# Altium PCB LAST.PcbDoc
Units mm, origin at the board's own origin, x right, y up, seen from the top; angles counter-clockwise.
Board outline 102.6 x 102.6 mm, 4 copper layers (Top Layer, Internal Plane 1, Internal Plane 2, Bottom Layer); 24 components, 43 nets, 165 pads, 0 vias.
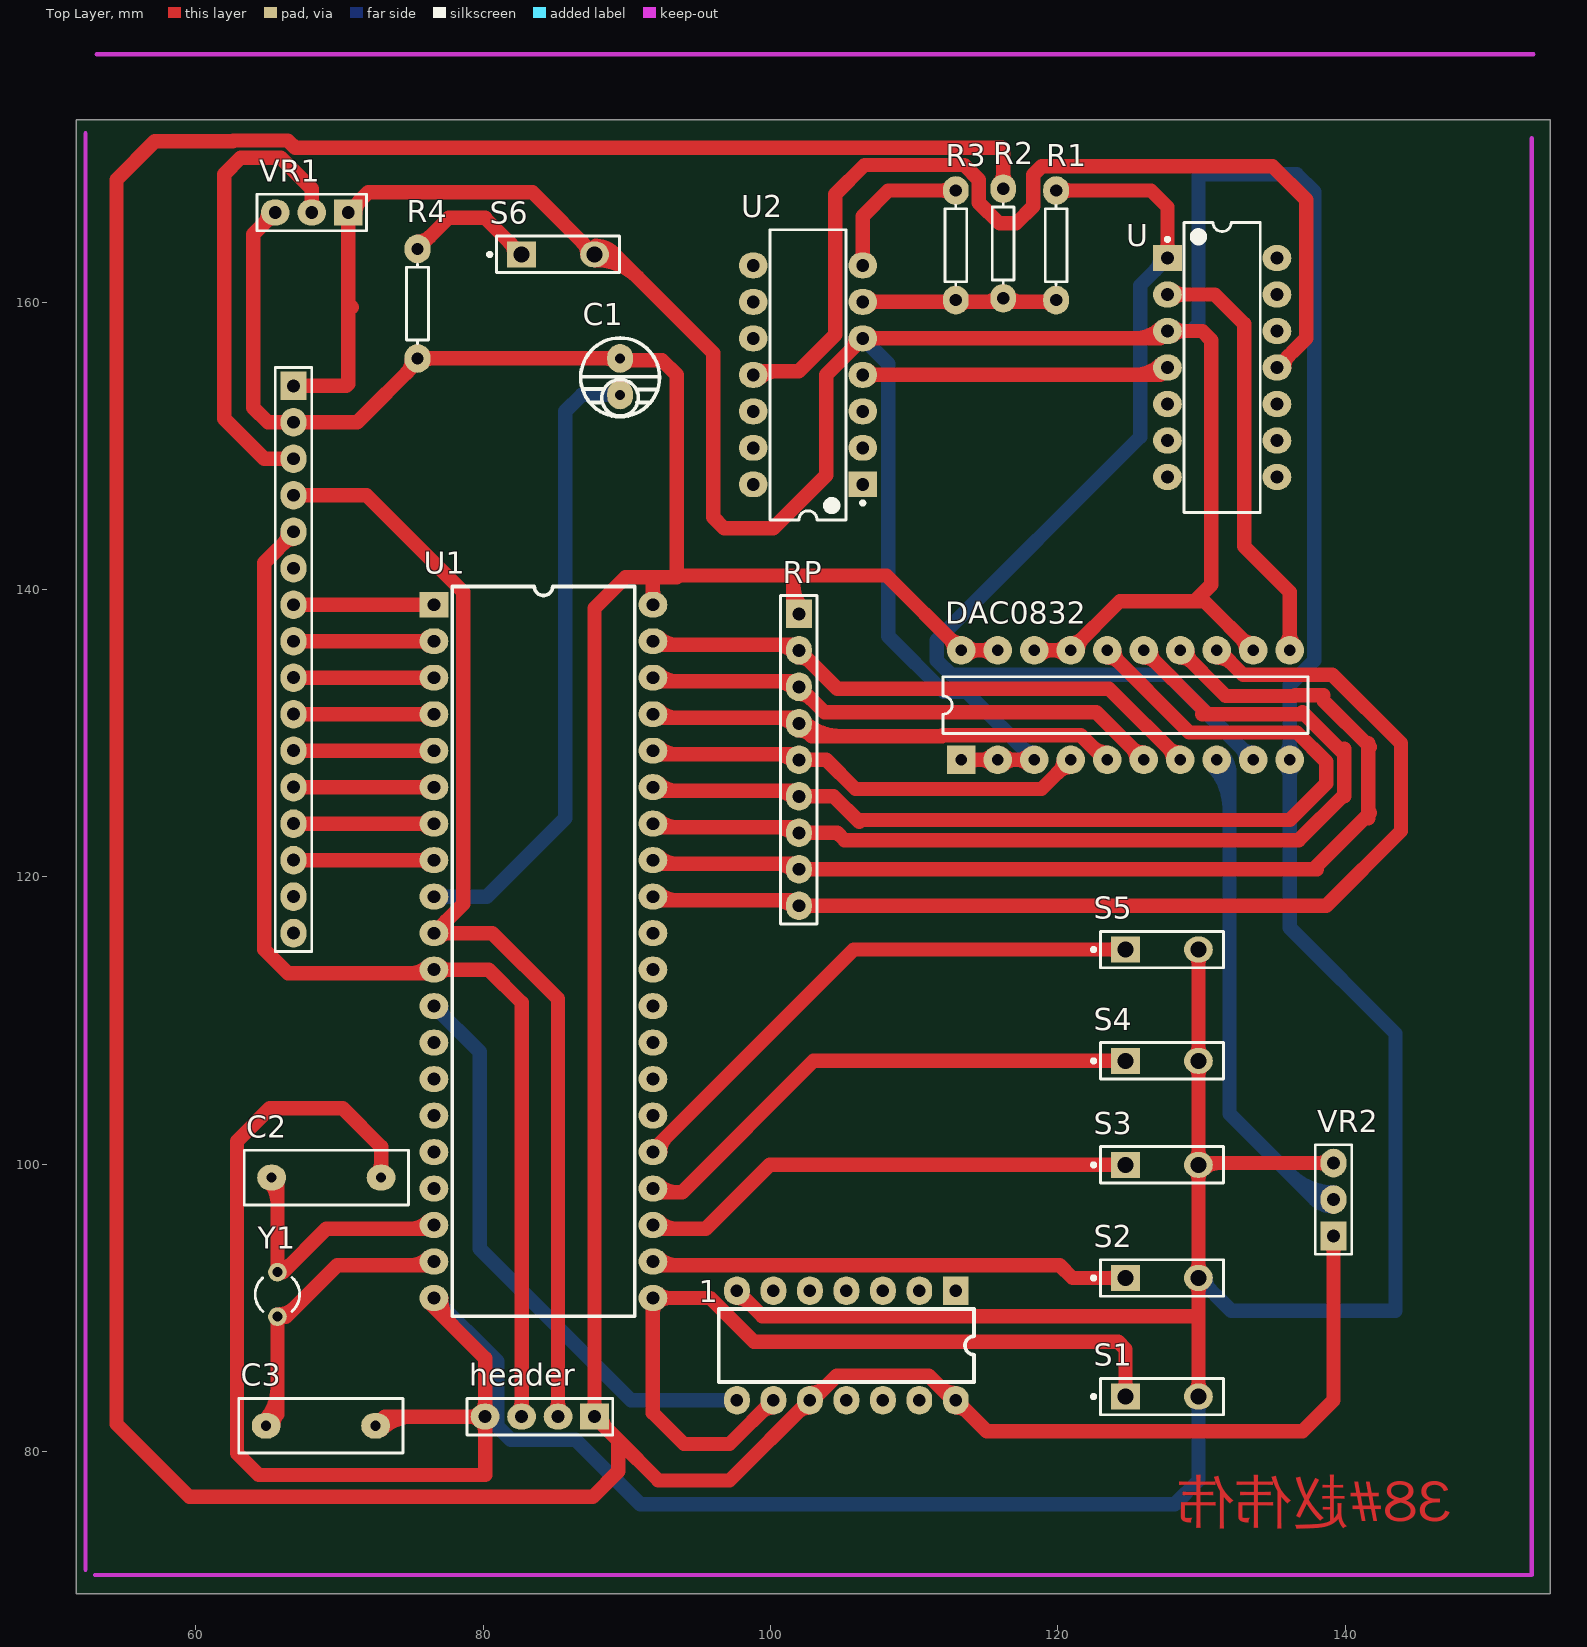
[diagram p0: Top Layer view]
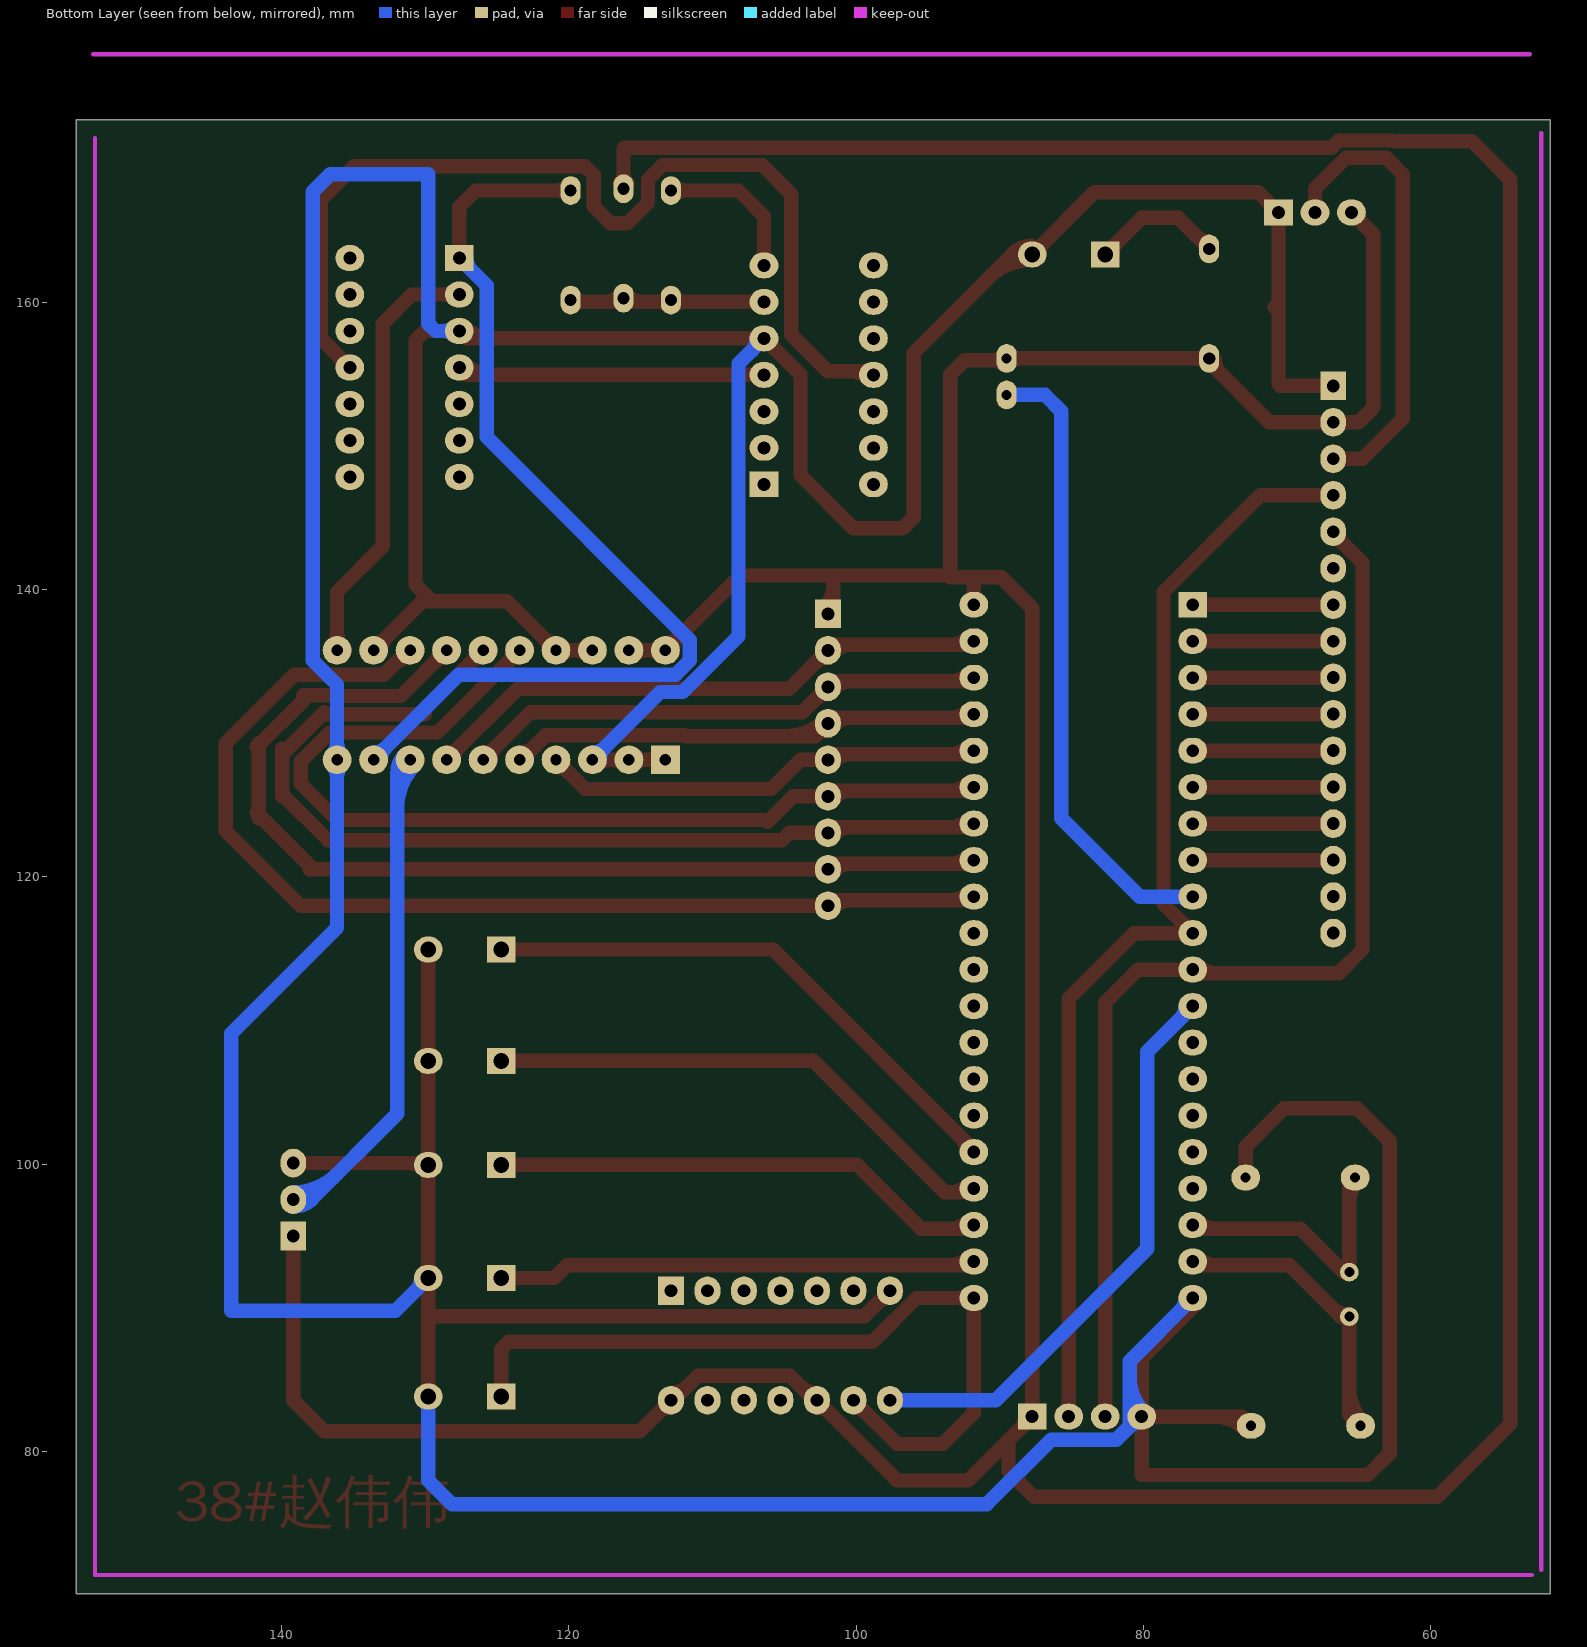
[diagram p1: Bottom Layer view, seen from below]
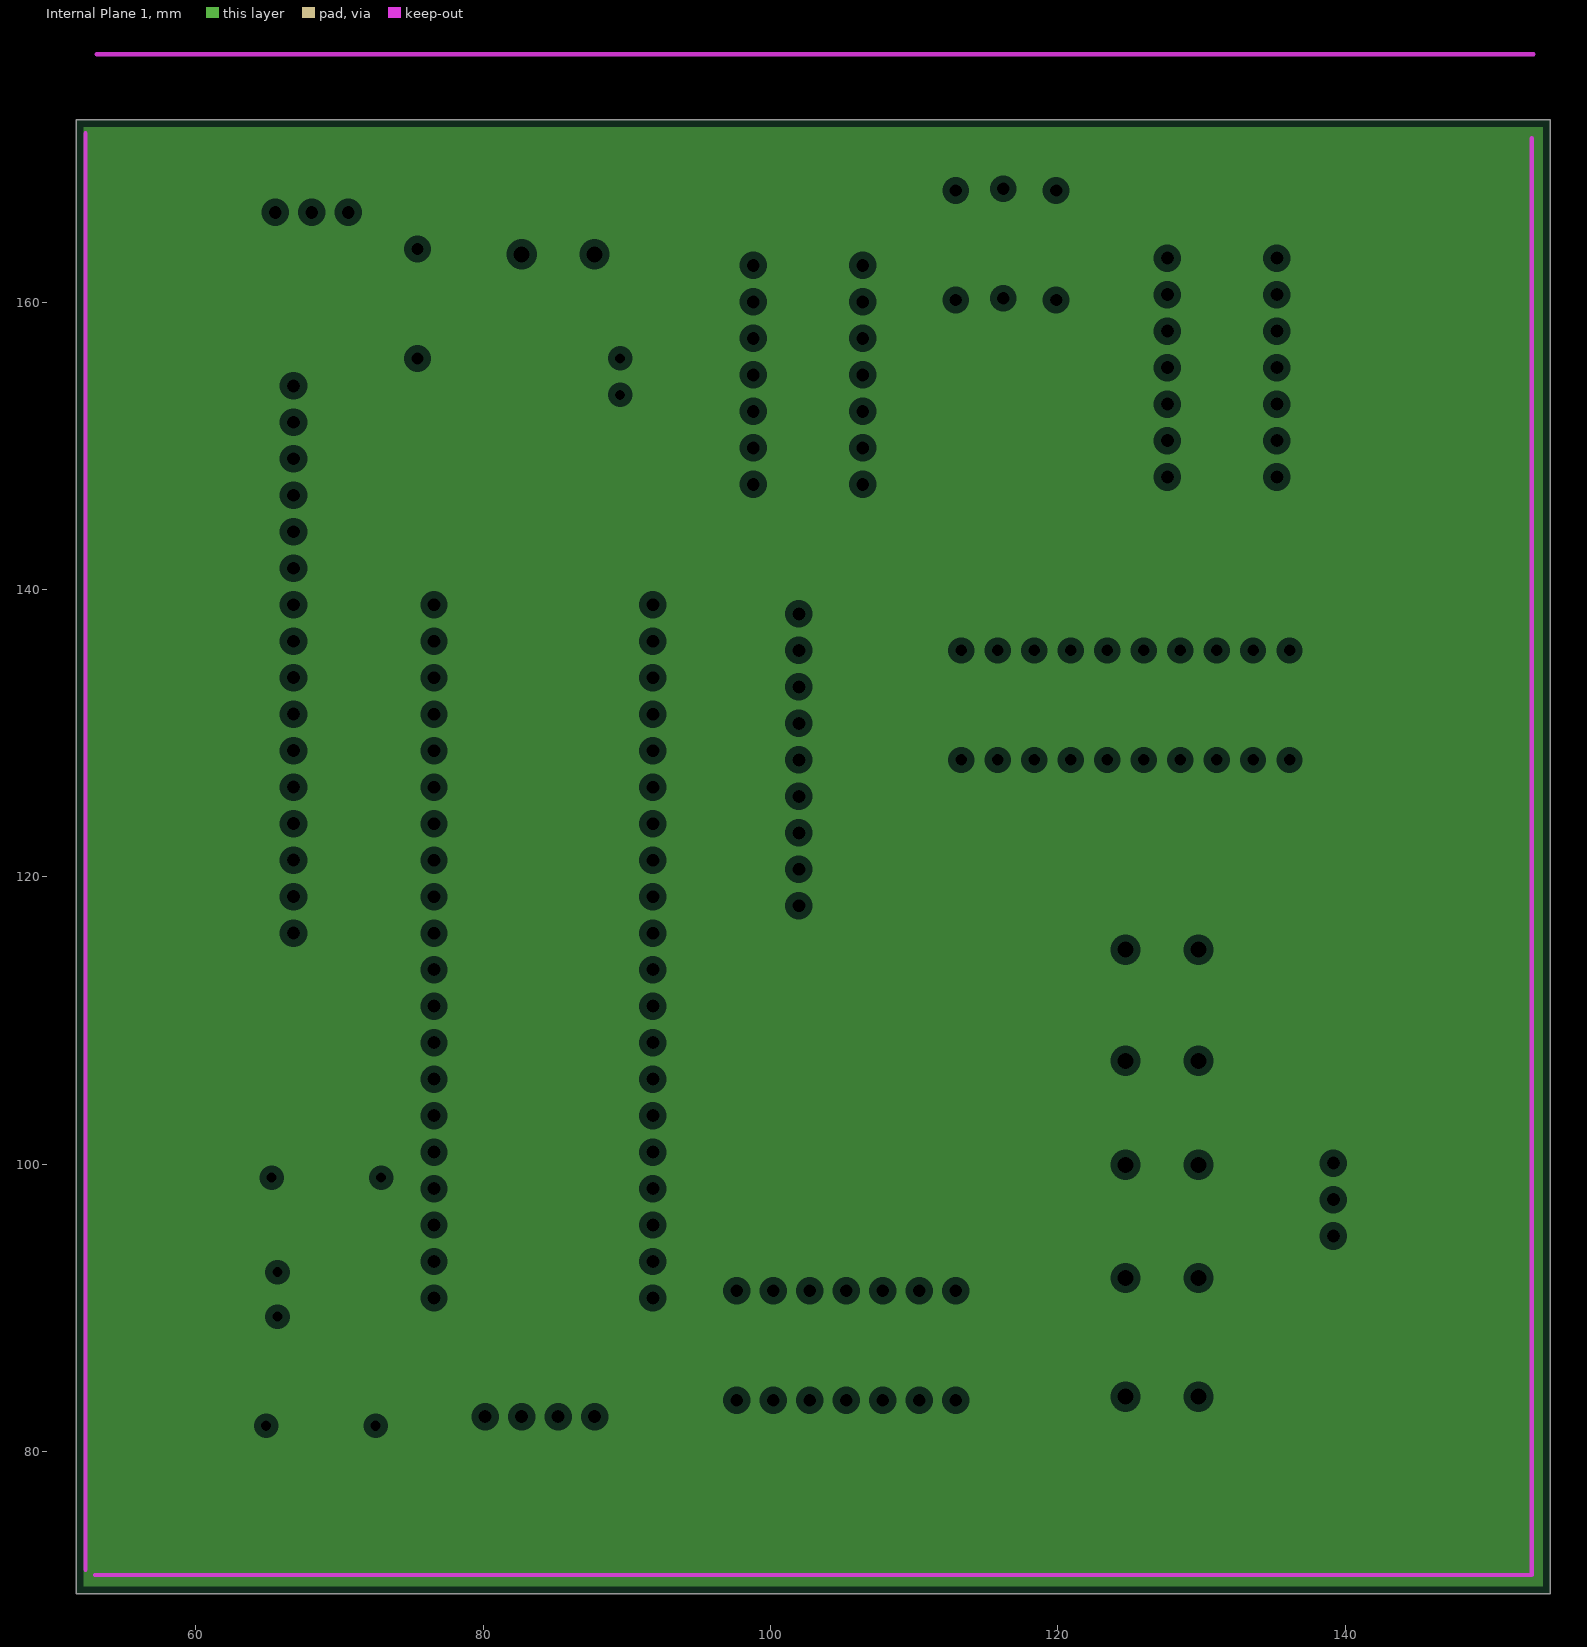
[diagram p2: Internal Plane 1, clearances drawn from the general rule]
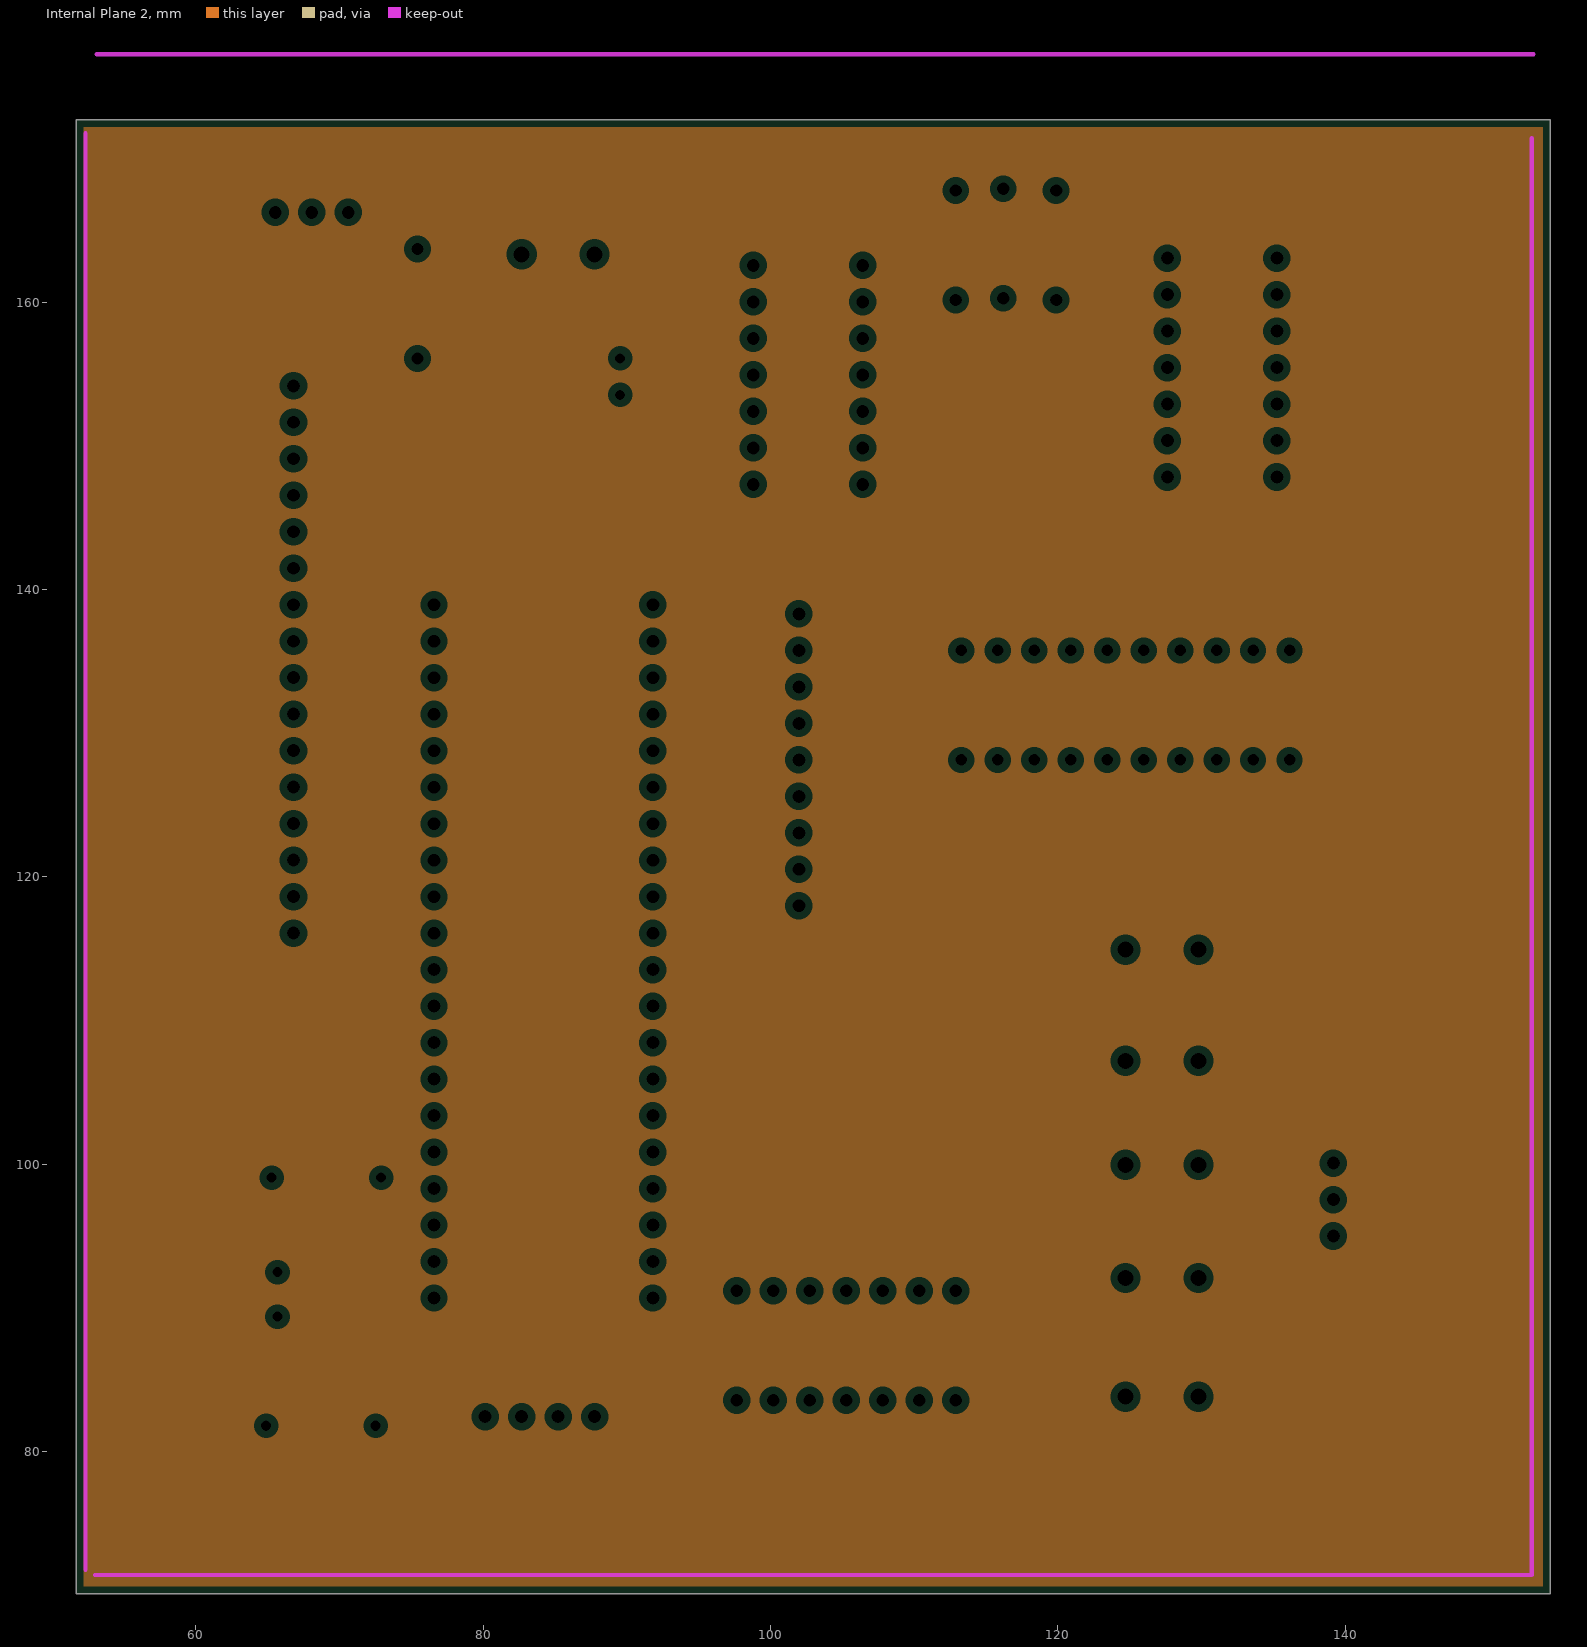
[diagram p3: Internal Plane 2, clearances drawn from the general rule]

## Layer stack, top to bottom
Top Layer: signal copper 0.0356
Dielectric: dielectric 0.32, FR-4, Dk 4.8
Internal Plane 1: plane copper 0.0356
Dielectric: dielectric 0.32, FR-4, Dk 4.8
Internal Plane 2: plane copper 0.0356
Dielectric: dielectric 0.32, FR-4, Dk 4.8
Bottom Layer: signal copper 0.0356

## Board outline
51.689,70.104 154.289,70.104 154.289,172.704 51.689,172.704

## Design rules (kind name [scope] priority, off if disabled: settings)
Clearance [All] p1: gap=0.2
PlaneClearance [All] p1: clearance=0.508
PlaneConnect [All] p1: planeconnectstyle=Relief reliefexpansion=0.508 reliefentries=4 reliefconductorwidth=0.254 reliefairgap=0.254
PolygonConnect [All] p1: connectstyle=Relief reliefconductorwidth=0.254 reliefentries=4 polygonreliefangle="90 Angle" airgapwidth=0.254
RoutingVias [All] p1: holewidth=0.6 width=1 viastyle="Through Hole" minholewidth=0.711 minwidth=1.27 maxholewidth=0.711 maxwidth=1.27
SolderMaskExpansion [All] p1: expansion=0.102
Width [All] p1: maxlimit=2 minlimit=0.2 preferedwidth=1 minimp=50.000000 maximp=50.000000 favimp=50.000000
26 further rules are at their usual default settings.

## Classes and differential pairs
component class 原理图: C1 C2 C3 header R1 R2 R3 R4 RP S1 S2 S3 S4 S5 S6

## Components (designator, comment, footprint, x,y, rotation, side; value= is the part's Value field where it differs from the comment)
1 "CMOS" DIP-14N 112.903,91.186 r270 top
C1 "CAP-E" EC-10 89.535,156.083 r270 top
C2 "Cap" RAD-0.3 69.088,99.06 r180 top
C3 "Cap" RAD-0.3 68.707,81.788 r180 top
DAC0832 "DAC0832" DAC0832LCN 113.284,128.143 r90 top
header "Header 4" HDR1X4 87.757,82.423 r180 top
R1 "Res1" AXIAL-0.3 119.888,163.957 r270 top
R2 "Res1" AXIAL-0.3 116.205,164.084 r270 top
R3 "Res1" AXIAL-0.3 112.903,163.957 r270 top
R4 "Res1" AXIAL-0.3 75.438,159.893 r90 top (schematic designator R6)
RP "Header 9" HDR1X9 101.981,138.303 r270 top
S1 "波形" SPST-2 127.254,83.82 r0 top (schematic designator S4)
S2 "频率升高" SPST-2 127.254,92.075 r0 top (schematic designator S5)
S3 "频率降低" SPST-2 127.254,99.949 r0 top (schematic designator S6)
S4 "占空比升高" SPST-2 127.254,107.188 r0 top (schematic designator S7)
S5 "占空比降低" SPST-2 127.254,114.935 r0 top (schematic designator S8)
S6 "SW-PB" SPST-2 85.217,163.322 r0 top (schematic designator S1)
U "LM324" DIP-14 131.445,155.448 r0 top
U1 "AT89C52" DIP40 76.581,138.938 r0 top
U2 "LM324" DIP-14 102.616,154.94 r180 top
VR1 "RES-V" HDR1X3 70.612,166.243 r180 top
VR2 "RES-V" HDR1X3 139.192,94.996 r90 top
Y1 "XTAL" R38 65.685,90.932 r0 top
? "1602" SIP16 66.802,154.178 r270 top

## Footprints (in the part's own frame and the unit in brackets; to place one, negate y for a bottom-side part, rotate by r counter-clockwise, add the part's x,y. Pads: shape width x height; smd on the part's side, far side on the other; paste and mask are expansions set on the pad)
AXIAL-0.3 [mm] "Axial Device, Thru-Hole; 2 Leads; 0.3 in Pin Spacing"
  oval 2x1.8 / inner oval 2x1.4 / far side oval 2x1.4 hole 0.85: 1(-3.81,0) 2(3.81,0)
  silkscreen extent -2.77,-0.76 2.77,0.76
DAC0832LCN [mm]
  rect 2x2 hole 0.8: 1(0,0)
  round 2 hole 0.8: 2(0,-2.54) 3(0,-5.08) 4(0,-7.62) 5(0,-10.16) 6(0,-12.7) 7(0,-15.24) 8(0,-17.78) 9(0,-20.32) 10(0,-22.86) 11(7.62,-22.86) 12(7.62,-20.32) 13(7.62,-17.78) 14(7.62,-15.24) 15(7.62,-12.7) 16(7.62,-10.16) 17(7.62,-7.62) 18(7.62,-5.08) 19(7.62,-2.54) 20(7.62,0)
  silkscreen extent 1.84,-24.13 5.78,1.27
DIP40 [mm]
  rect 2x1.8 hole 0.889: 1(0,0)
  oval 2x1.8 hole 0.889: 2(0,-2.54) 3(0,-5.08) 4(0,-7.62) 5(0,-10.16) 6(0,-12.7) 7(0,-15.24) 8(0,-17.78) 9(0,-20.32) 10(0,-22.86) 11(0,-25.4) 12(0,-27.94) 13(0,-30.48) 14(0,-33.02) 15(0,-35.56) 16(0,-38.1) 17(0,-40.64) 18(0,-43.18) 19(0,-45.72) 20(0,-48.26) 21(15.24,-48.26) 22(15.24,-45.72) 23(15.24,-43.18) 24(15.24,-40.64) 25(15.24,-38.1) 26(15.24,-35.56) 27(15.24,-33.02) 28(15.24,-30.48) 29(15.24,-27.94) 30(15.24,-25.4) 31(15.24,-22.86) 32(15.24,-20.32) 33(15.24,-17.78) 34(15.24,-15.24) 35(15.24,-12.7) 36(15.24,-10.16) 37(15.24,-7.62) 38(15.24,-5.08) 39(15.24,-2.54) 40(15.24,0)
  silkscreen extent 1.27,-49.53 13.97,1.27
DIP-14 [mm] "DIP; 14 Leads; Row Spacing 7.62 mm; Pitch 2.54 mm"
  rect 2x1.8 hole 0.9: 1(-3.81,7.62)
  oval 2x1.8 hole 0.9: 2(-3.81,5.08) 3(-3.81,2.54) 4(-3.81,0) 5(-3.81,-2.54) 6(-3.81,-5.08) 7(-3.81,-7.62) 8(3.81,-7.62) 9(3.81,-5.08) 10(3.81,-2.54) 11(3.81,0) 12(3.81,2.54) 13(3.81,5.08) 14(3.81,7.62)
  silkscreen extent -3.93,-10.1 2.65,10.1, body extent -3.6,-10.1 3.6,10.1, height 5.08
DIP-14N [mm]
  rect 2x1.8 hole 0.889: 1(0,0)
  oval 2x1.8 hole 0.889: 2(0,-2.54) 3(0,-5.08) 4(0,-7.62) 5(0,-10.16) 6(0,-12.7) 7(0,-15.24) 8(7.62,-15.24) 9(7.62,-12.7) 10(7.62,-10.16) 11(7.62,-7.62) 12(7.62,-5.08) 13(7.62,-2.54) 14(7.62,0)
  silkscreen extent 1.27,-16.51 6.35,1.27
EC-10 [mm]
  oval 2x1.8 / inner oval 2x1.4 / far side oval 2x1.4 hole 0.7: 1(0,0) 2(2.54,0)
  silkscreen extent -1.42,-2.74 4.06,2.74, body extent -1.23,-2.51 3.82,2.54, height 11.53
HDR1X3 [mm] "Connector; Header; 3 Position"
  rect 2x1.8 hole 0.9: 1(0,0)
  oval 2x1.8 hole 0.9: 2(2.54,0) 3(5.08,0)
  silkscreen extent -1.27,-1.27 6.35,1.27
HDR1X4 [mm] "Connector; Header; 4 Position"
  rect 2x1.8 hole 0.9: 1(0,0)
  oval 2x1.8 hole 0.9: 2(2.54,0) 3(5.08,0) 4(7.62,0)
  silkscreen extent -1.27,-1.27 8.89,1.27
HDR1X9 [mm] "Connector; Header; 9 Position"
  rect 2x1.8 hole 0.9: 1(0,0)
  oval 2x1.8 hole 0.9: 2(2.54,0) 3(5.08,0) 4(7.62,0) 5(10.16,0) 6(12.7,0) 7(15.24,0) 8(17.78,0) 9(20.32,0)
  silkscreen extent -1.27,-1.27 21.59,1.27
R38 [mm] "Crystal, Thru-Hole; 2 Leads; Body 3.1 x 8.2 mm (Dia.xH)"
  round 1.3 hole 0.7: 1(0,1.55) 2(0,-1.55)
  silkscreen extent -1.55,-1.19 1.55,1.17
RAD-0.3 [mm] "Radial Cap, Thru-Hole; 2 Leads; 0.3 in Pin Spacing"
  oval 2x1.8 hole 0.7: 1(-3.81,0) 2(3.81,0)
  silkscreen extent -5.71,-1.91 5.71,1.91
SIP16 [mm]
  rect 2x1.8 hole 0.9: 1(0,0)
  oval 2x1.8 hole 0.9: 2(2.54,0) 3(5.08,0) 4(7.62,0) 5(10.16,0) 6(12.7,0) 7(15.24,0) 8(17.78,0) 9(20.32,0) 10(22.86,0) 11(25.4,0) 12(27.94,0) 13(30.48,0) 14(33.02,0) 15(35.56,0) 16(38.1,0)
  silkscreen extent -1.27,-1.27 39.37,1.27
SPST-2 [mm] "Switch; 2 Leads"
  rect 2x1.8 hole 1.1: 1(-2.54,0)
  oval 2x1.8 hole 1.1: 2(2.54,0)
  silkscreen extent -4.89,-1.27 4.28,1.27

## Part data
C1: "电解电容"
C2 C3: "Capacitor"
header: "Header, 4-Pin"
R1 R2 R3 R4: "Resistor"
RP: "Header, 9-Pin"
S1 S2 S3 S4 S5: library part SW-PB, "Switch"
S6: "Switch"
U1: "8-Bit Microcontroller with 8K Flash ROM"
VR1 VR2: "Potentiometer"
Y1: "Crystal Oscillator"

## Nets (pads, with @x,y where several pads share a name; then routed paths per layer and width w, separated by ;. In a path a pad name is that pad's centre, name@x,y a point inside that pad or via, vN(x,y) a via of type N, cw(c..) or ccw(c..) an arc to the next point about the centre after c; other vN are vias at no path point)
0: ?.7 U1.1 | length 12.5
  Top Layer w1: ?.7 75.946,138.938 U1.1@76.2,138.684 ; ?.7@67.085,138.655 cw(c67.768,137.972) 67.768,138.938 cw(c67.768,139.904) ?.7@67.085,139.221 ; U1.1@76.198,138.655 ccw(c75.515,137.972) 75.515,138.938 ccw(c75.515,139.904) U1.1@76.198,139.221
1: ?.8 U1.2 | length 12.5
  Top Layer w1: ?.8 75.946,136.398 U1.2@76.2,136.144 ; ?.8@67.085,136.115 cw(c67.768,135.432) 67.768,136.398 cw(c67.768,137.364) ?.8@67.085,136.681 ; U1.2@76.198,136.115 ccw(c75.515,135.432) 75.515,136.398 ccw(c75.515,137.364) U1.2@76.198,136.681
2: ?.9 U1.3 | length 12.5
  Top Layer w1: ?.9 75.946,133.858 U1.3@76.2,133.604 ; ?.9@67.085,133.575 cw(c67.768,132.892) 67.768,133.858 cw(c67.768,134.824) ?.9@67.085,134.141 ; U1.3@76.198,133.575 ccw(c75.515,132.892) 75.515,133.858 ccw(c75.515,134.824) U1.3@76.198,134.141
3: ?.10 U1.4 | length 12.5
  Top Layer w1: ?.10 75.946,131.318 U1.4@76.2,131.064 ; ?.10@67.085,131.035 cw(c67.768,130.352) 67.768,131.318 cw(c67.768,132.284) ?.10@67.085,131.601 ; U1.4@76.198,131.035 ccw(c75.515,130.352) 75.515,131.318 ccw(c75.515,132.284) U1.4@76.198,131.601
4: ?.11 U1.5 | length 12.5
  Top Layer w1: ?.11 75.946,128.778 U1.5@76.2,128.524 ; ?.11@67.085,128.495 cw(c67.768,127.812) 67.768,128.778 cw(c67.768,129.744) ?.11@67.085,129.061 ; U1.5@76.198,128.495 ccw(c75.515,127.812) 75.515,128.778 ccw(c75.515,129.744) U1.5@76.198,129.061
5: ?.12 U1.6 | length 12.5
  Top Layer w1: ?.12 75.946,126.238 U1.6@76.2,125.984 ; ?.12@67.085,125.955 cw(c67.768,125.272) 67.768,126.238 cw(c67.768,127.204) ?.12@67.085,126.521 ; U1.6@76.198,125.955 ccw(c75.515,125.272) 75.515,126.238 ccw(c75.515,127.204) U1.6@76.198,126.521
6: ?.13 U1.7 | length 12.5
  Top Layer w1: ?.13 75.946,123.698 U1.7@76.2,123.444 ; ?.13@67.085,123.415 cw(c67.768,122.732) 67.768,123.698 cw(c67.768,124.664) ?.13@67.085,123.981 ; U1.7@76.198,123.415 ccw(c75.515,122.732) 75.515,123.698 ccw(c75.515,124.664) U1.7@76.198,123.981
7: ?.14 U1.8 | length 12.5
  Top Layer w1: ?.14 75.946,121.158 U1.8@76.2,120.904 ; ?.14@67.085,120.875 cw(c67.768,120.192) 67.768,121.158 cw(c67.768,122.124) ?.14@67.085,121.441 ; U1.8@76.198,120.875 ccw(c75.515,120.192) 75.515,121.158 ccw(c75.515,122.124) U1.8@76.198,121.441
+12V: U2.4 U.4 | length 25.1
  Top Layer w1: U2.4 127.127,154.94 U.4 ; U2.4@106.809,154.657 cw(c107.492,153.974) 107.492,154.94 cw(c107.492,155.906) U2.4@106.809,155.223 ; 125.343,154.94 ccw(c125.343,157.64) U.4@127.252,155.731
-12V: U2.11 U.11 | length 71.7
  Top Layer w1: U2.11 99.06,155.194 101.981,155.194 104.521,157.734 104.521,167.513 106.553,169.545 113.488,169.545 114.503,168.53 114.503,166.929 115.951,165.481 117.094,165.481 118.288,166.675 118.288,168.86 118.895,169.467 134.952,169.467 137.287,167.132 137.287,157.48 U.11 ; U2.11@99.189,154.657 cw(c100.485,153.361) 100.485,155.194 ; U.11@135.755,155.448 cw(c136.962,155.448) 136.109,156.302
D0: DAC0832.7 RP.2 U1.39 | length 46.2
  Top Layer w1: U1.39@91.44,136.144 101.6,136.144 RP.2 104.648,133.096 123.571,133.096 DAC0832.7 ; U1.39@92.204,136.681 ccw(c93.5,137.977) 93.5,136.144 ; 100.337,136.144 cw(c100.337,134.219) RP.2@101.698,135.58 ; RP.2@101.981,135.263 cw(c101.981,134.056) 102.835,134.909 ; DAC0832.7@128.024,128.143 ccw(c126.817,128.143) 127.67,128.997 ccw(c128.524,129.85) DAC0832.7@128.524,128.643
D1: DAC0832.6 RP.3 U1.38 | length 42.6
  Top Layer w1: U1.38@91.44,133.604 101.6,133.604 RP.3 103.759,131.445 122.682,131.445 DAC0832.6 ; U1.38@92.204,134.141 ccw(c93.5,135.437) 93.5,133.604 ; 100.337,133.604 cw(c100.337,131.679) RP.3@101.698,133.04 ; RP.3@101.981,132.723 cw(c101.981,131.516) 102.835,132.369 ; DAC0832.6@125.484,128.143 ccw(c124.277,128.143) 125.13,128.997 ccw(c125.984,129.85) DAC0832.6@125.984,128.643
D2: DAC0832.5 RP.4 U1.37 | length 41.2
  Top Layer w1: U1.37@91.44,131.064 101.6,131.064 RP.4 102.87,129.794 111.945,129.794 111.994,129.843 121.608,129.843 123.308,128.143 DAC0832.5 ; U1.37@92.204,131.601 ccw(c93.5,132.897) 93.5,131.064 ; 100.337,131.064 cw(c100.337,129.139) RP.4@101.698,130.5 ; RP.4@101.981,130.183 cw(c101.981,128.976) 102.835,129.829 ; RP.4@102.264,130.866 ccw(c104.851,133.453) 104.851,129.794 ; 122.359,129.093 ccw(c123.444,130.178) DAC0832.5@123.444,128.643
D3: DAC0832.4 RP.5 U1.36 | length 37.1
  Top Layer w1: U1.36@91.44,128.524 RP.5@101.6,128.524 ; U1.36@92.204,129.061 ccw(c93.5,130.357) 93.5,128.524 ; 100.337,128.524 cw(c100.337,126.599) RP.5@101.698,127.96 ; RP.5 103.886,128.143 105.918,126.111 118.872,126.111 DAC0832.4 ; RP.5@102.264,127.86 cw(c102.947,127.177) 102.947,128.143 cw(c102.947,129.109) RP.5@102.264,128.426 ; DAC0832.4@120.404,128.143 cw(c119.197,128.143) 120.05,127.289 cw(c120.904,126.436) DAC0832.4@120.904,127.643
D4: DAC0832.16 RP.6 U1.35 | length 75.6
  Top Layer w1: U1.35@91.44,125.984 101.6,125.984 RP.6 104.394,125.603 106.172,123.825 106.299,123.952 136.144,123.952 138.684,126.492 138.684,128.016 136.652,130.048 129.159,130.048 DAC0832.16 ; U1.35@92.204,126.521 ccw(c93.5,127.817) 93.5,125.984 ; 100.337,125.984 cw(c100.337,124.059) RP.6@101.698,125.42 ; RP.6@102.264,125.32 cw(c102.947,124.637) 102.947,125.603 cw(c102.947,126.569) RP.6@102.264,125.886 ; DAC0832.16@123.444,135.263 cw(c123.444,134.056) 124.298,134.909 cw(c125.151,135.763) DAC0832.16@123.944,135.763
D5: DAC0832.15 RP.7 U1.34 | length 76.5
  Top Layer w1: U1.34@91.44,123.444 RP.7@101.6,123.444 ; U1.34@92.204,123.981 ccw(c93.5,125.277) 93.5,123.444 ; 100.337,123.444 cw(c100.337,121.519) RP.7@101.698,122.88 ; RP.7 104.648,123.063 105.156,122.555 136.779,122.555 139.954,125.73 ; RP.7@102.264,122.78 cw(c102.947,122.097) 102.947,123.063 cw(c102.947,124.029) RP.7@102.264,123.346 ; DAC0832.15@125.984,135.263 cw(c125.984,134.056) 126.838,134.909 cw(c127.691,135.763) DAC0832.15@126.484,135.763 ; DAC0832.15 130.175,131.572 ; 130.048,131.318 137.16,131.318 ; 137.033,131.445 139.954,128.524 ; 139.954,125.603 139.954,128.905
D6: DAC0832.14 RP.8 U1.33 | length 79.4
  Top Layer w1: U1.33@91.44,120.904 101.6,120.904 RP.8 138.049,120.523 ; U1.33@92.204,121.441 ccw(c93.5,122.737) 93.5,120.904 ; 100.337,120.904 cw(c100.337,118.979) RP.8@101.698,120.34 ; RP.8@102.264,120.24 cw(c102.947,119.557) 102.947,120.523 cw(c102.947,121.489) RP.8@102.264,120.806 ; DAC0832.14@128.524,135.263 cw(c128.524,134.056) 129.378,134.909 cw(c130.231,135.763) DAC0832.14@129.024,135.763 ; DAC0832.14 131.699,132.588 136.479,132.588 136.536,132.645 138.5,132.645 ; 138.049,120.777 141.732,124.46 ; 138.5,132.264 141.732,129.032 ; 141.605,124.079 141.605,129.286
D7: DAC0832.13 RP.9 U1.32 | length 82
  Top Layer w1: U1.32@91.44,118.364 101.6,118.364 RP.9 138.684,117.983 143.891,123.19 143.891,129.286 139.114,134.063 132.9,134.063 131.2,135.763 DAC0832.13 ; U1.32@92.204,118.901 ccw(c93.5,120.197) 93.5,118.364 ; 100.337,118.364 cw(c100.337,116.439) RP.9@101.698,117.8 ; RP.9@102.264,117.7 cw(c102.947,117.017) 102.947,117.983 cw(c102.947,118.949) RP.9@102.264,118.266 ; DAC0832.13@131.064,135.263 cw(c131.064,133.728) 132.149,134.813
E: ?.6
EA: U1.13
GND: 1.7 ?.1 C2.1 C3.1 DAC0832.1 DAC0832.2 DAC0832.3 DAC0832.10 DAC0832.12 DAC0832.17 DAC0832.18 header.4 S1.2 S2.2 S3.2 S4.2 S5.2 S6.2 U1.20 U2.5 U.3 VR1.1 VR2.3 | length 589.8
  Top Layer w1: ?.1 70.485,154.178 70.612,154.305 70.612,159.893 ; ?.1@67.085,153.895 cw(c67.768,153.212) 67.768,154.178 cw(c67.768,155.144) ?.1@67.085,154.461 ; VR1.1@70.329,165.96 cw(c69.646,165.277) 70.612,165.277 cw(c71.578,165.277) VR1.1@70.895,165.96 ; 70.866,159.639 70.612,159.893 ; VR1.1@71.112,166.243 cw(c72.319,166.243) VR1.1@71.466,167.097 ; C3.1 73.152,82.423 header.4 ; C2.1@72.615,99.343 ccw(c71.932,100.026) 72.898,100.026 ccw(c73.864,100.026) C2.1@73.181,99.343 ; C2.1 72.898,101.219 70.231,103.886 65.151,103.886 62.865,101.6 62.865,79.883 64.389,78.359 80.137,78.359 header.4 ; C3.1@72.9,81.505 cw(c75.116,79.289) 75.116,82.423 ; U1.20 76.263,90.361 80.137,86.487 header.4 ; U1.20@77.081,90.678 ccw(c79.821,90.678) 77.884,88.74 ; header.4@79.754,82.14 ccw(c79.071,81.457) 79.071,82.423 ccw(c79.071,83.389) header.4@79.754,82.706 ; header.4@79.854,82.14 cw(c79.171,81.457) 80.137,81.457 cw(c81.103,81.457) header.4@80.42,82.14 ; header.4@79.854,82.706 ccw(c79.171,83.389) 80.137,83.389 ccw(c81.103,83.389) header.4@80.42,82.706 ; 86.903,164.176 cw(c86.05,163.322) S6.2@87.257,163.322 ; S6.2@87.857,162.922 cw(c87.857,158.825) 90.754,161.722 ; S6.2@87.857,163.922 cw(c87.857,162.239) 89.047,163.429 ; S6.2@88.14,163.039 cw(c88.823,162.356) 88.823,163.322 cw(c88.823,164.288) S6.2@88.14,163.605 ; 1.7@97.663,90.686 cw(c97.663,89.479) 98.517,90.332 ; 1.7 99.441,89.408 129.54,89.408 129.794,89.662 ; 105.572,156.626 ccw(c104.719,157.48) U2.5@105.926,157.48 ; U2.5@106.809,157.197 cw(c107.492,156.514) 107.492,157.48 cw(c107.492,158.446) U2.5@106.809,157.763 ; DAC0832.1 DAC0832.2 DAC0832.3 ; DAC0832.1@113.638,127.789 cw(c114.491,126.936) 114.491,128.143 cw(c114.491,129.35) DAC0832.1@113.638,128.497 ; DAC0832.2@115.47,127.789 ccw(c114.617,126.936) 114.617,128.143 ccw(c114.617,129.35) DAC0832.2@115.47,128.497 ; DAC0832.2@116.178,127.789 cw(c117.031,126.936) 117.031,128.143 cw(c117.031,129.35) DAC0832.2@116.178,128.497 ; DAC0832.3@118.01,127.789 ccw(c117.157,126.936) 117.157,128.143 ccw(c117.157,129.35) DAC0832.3@118.01,128.497 ; DAC0832.18 DAC0832.17 124.333,139.192 129.54,139.192 ; DAC0832.18@118.718,135.409 cw(c119.571,134.556) 119.571,135.763 cw(c119.571,136.97) DAC0832.18@118.718,136.117 ; DAC0832.17@120.55,135.409 ccw(c119.697,134.556) 119.697,135.763 ccw(c119.697,136.97) DAC0832.17@120.55,136.117 ; DAC0832.17@120.904,136.263 ccw(c120.904,137.47) 121.758,136.617 ccw(c122.611,135.763) DAC0832.17@121.404,135.763 ; 125.343,157.48 ccw(c125.343,160.18) U.3@127.252,158.271 ; U.3@128.018,157.705 cw(c128.701,157.022) 128.701,157.988 cw(c128.701,158.954) U.3@128.018,158.271 ; S1.2@129.511,84.103 ccw(c128.828,84.786) 129.794,84.786 ccw(c130.76,84.786) S1.2@130.077,84.103 ; S2.2@129.511,91.792 cw(c128.828,91.109) 129.794,91.109 cw(c130.76,91.109) S2.2@130.077,91.792 ; S2.2@129.511,92.358 ccw(c128.828,93.041) 129.794,93.041 ccw(c130.76,93.041) S2.2@130.077,92.358 ; S3.2@129.511,99.666 cw(c128.828,98.983) 129.794,98.983 cw(c130.76,98.983) S3.2@130.077,99.666 ; S3.2@129.511,100.232 ccw(c128.828,100.915) 129.794,100.915 ccw(c130.76,100.915) S3.2@130.077,100.232 ; S4.2@129.511,106.905 cw(c128.828,106.222) 129.794,106.222 cw(c130.76,106.222) S4.2@130.077,106.905 ; S4.2@129.511,107.471 ccw(c128.828,108.154) 129.794,108.154 ccw(c130.76,108.154) S4.2@130.077,107.471 ; S5.2@129.511,114.652 cw(c128.828,113.969) 129.794,113.969 cw(c130.76,113.969) S5.2@130.077,114.652 ; S1.2 129.794,89.662 ; S5.2 S4.2 S3.2 ; S3.2@130.177,99.666 cw(c131.166,98.677) 131.166,100.076 ; DAC0832.12@133.104,135.763 ccw(c131.897,135.763) 132.75,136.617 ccw(c133.604,137.47) DAC0832.12@133.604,136.263 ; DAC0832.12 130.175,139.192 129.54,139.192 ; DAC0832.10@135.89,127.889 DAC0832.10 ; VR2.3@138.909,99.793 ccw(c138.226,99.11) 138.226,100.076 ccw(c138.226,101.042) VR2.3@138.909,100.359 ; VR2.3 129.921,100.076 S3.2 ; 70.612,159.893 VR1.1 72.009,167.64 83.439,167.64 S6.2 89.154,163.322 96.012,156.464 96.012,145.034 96.774,144.272 100.203,144.272 103.886,147.955 103.886,154.94 U2.5 127.127,157.48 U.3 130.048,157.988 130.683,157.353 130.683,140.335 129.54,139.192 ; 129.794,89.662 S2.2 S3.2
  Bottom Layer w1: U1.20 80.977,86.282 80.977,81.76 81.914,80.823 86.436,80.823 90.932,76.327 128.143,76.327 129.794,77.978 S1.2 ; U1.20@77.081,90.678 ccw(c78.288,90.678) 77.435,89.824 ; header.4@79.954,82.706 ccw(c77.485,85.175) 80.977,85.175 ; header.4@80.237,82.023 cw(c80.237,80.871) 81.052,81.686 ; U2.5 108.204,155.702 108.204,136.742 112.083,132.863 113.644,132.863 DAC0832.3 ; U2.5@106.926,157.48 ccw(c108.133,157.48) 107.28,156.626 ; DAC0832.3@117.864,128.143 ccw(c116.657,128.143) 117.51,128.997 ccw(c118.364,129.85) DAC0832.3@118.364,128.643 ; U.3 129.286,157.988 129.794,158.496 129.794,168.91 136.623,168.91 137.844,167.689 137.844,135.059 136.144,133.359 DAC0832.10 136.144,116.459 143.51,109.093 143.51,89.789 132.08,89.789 S2.2 ; U.3@128.018,157.705 cw(c128.701,157.022) 128.701,157.988 cw(c128.701,158.954) U.3@128.018,158.271 ; S1.2@129.511,83.537 cw(c128.828,82.854) 129.794,82.854 cw(c130.76,82.854) S1.2@130.077,83.537 ; S2.2@130.294,92.075 ccw(c131.501,92.075) 130.648,91.221 ; DAC0832.10@135.79,127.789 cw(c134.937,126.936) 136.144,126.936 cw(c137.351,126.936) DAC0832.10@136.498,127.789 ; DAC0832.10@135.79,128.497 ccw(c134.937,129.35) 136.144,129.35 ccw(c137.351,129.35) DAC0832.10@136.498,128.497
IN: 1.8 U1.12 | length 42.9
  Bottom Layer w1: U1.12 79.756,107.823 79.756,94.107 90.297,83.566 1.8 ; U1.12@77.081,110.998 ccw(c78.288,110.998) 77.435,110.144 ; 1.8@97.38,83.283 ccw(c96.697,82.6) 96.697,83.566 ccw(c96.697,84.532) 1.8@97.38,83.849
Net1_9: 1.9 S1.1 U1.21 | length 61.7
  Top Layer w1: U1.21@91.538,90.395 cw(c90.855,89.712) 91.821,89.712 cw(c92.787,89.712) U1.21@92.104,90.395 ; U1.21@92.204,90.395 cw(c92.887,89.712) 92.887,90.678 cw(c92.887,91.644) U1.21@92.204,90.961 ; 99.349,82.712 cw(c100.203,81.859) 1.9@100.203,83.066 ; 1.9 97.155,80.518 93.98,80.518 91.821,82.677 U1.21 95.808,90.678 98.856,87.63 124.206,87.63 124.714,87.122 S1.1 ; S1.1@124.431,84.103 ccw(c123.748,84.786) 124.714,84.786 ccw(c125.68,84.786) S1.1@124.997,84.103
NET9: C1.2 U1.9 | length 45.5
  Bottom Layer w1: U1.9 80.264,118.618 85.725,124.079 85.725,152.4 86.868,153.543 C1.2 ; U1.9@76.964,118.335 cw(c77.647,117.652) 77.647,118.618 cw(c77.647,119.584) U1.9@76.964,118.901
Net_3: ?.3 VR1.2 | length 35.1
  Top Layer w1: ?.3@66.519,148.815 ccw(c65.836,148.132) 65.836,149.098 ccw(c65.836,150.064) ?.3@66.519,149.381 ; ?.3 64.77,149.098 61.976,151.892 61.976,168.91 63.119,170.053 65.913,170.053 68.072,167.894 VR1.2 ; VR1.2@67.789,166.526 ccw(c67.106,167.209) 68.072,167.209 ccw(c69.038,167.209) VR1.2@68.355,166.526
NetC2_2: C2.2 U1.18 Y1.1 | length 22.5
  Top Layer w1: C2.2@65.095,98.777 cw(c63.671,97.353) 65.685,97.353 ; C2.2 65.685,98.653 Y1.1 66.066,92.482 69.088,95.504 U1.18@76.2,95.504 ; Y1.1@65.685,92.632 ccw(c65.685,93.914) 66.591,93.007 ; 74.902,95.504 ccw(c74.902,97.337) U1.18@76.198,96.041
NetC3_2: C3.2 U1.19 Y1.2 | length 26.2
  Top Layer w1: C3.2@64.714,82.071 ccw(c62.37,84.415) 65.685,84.415 ; C3.2 65.685,82.576 ; C3.2@65.396,81.813 cw(c66.387,81.874) 65.685,82.576 ; Y1.2@65.685,89.532 ccw(c65.685,91.302) 66.936,90.05 ; 74.902,92.964 ccw(c74.902,94.797) U1.19@76.198,93.501 ; U1.19@76.2,92.964 69.85,92.964 66.268,89.382 Y1.2 65.685,82.576
NetDAC0832_8: DAC0832.8 VR2.2 | length 45.8
  Bottom Layer w1: DAC0832.8@130.71,127.789 cw(c127.711,124.79) 131.953,124.79 ; DAC0832.8 131.953,127.254 131.953,103.505 137.922,97.536 VR2.2 ; DAC0832.8@131.418,128.497 cw(c130.125,127.204) 131.953,127.204 ; 136.17,99.288 ccw(c139.192,102.309) VR2.2@139.192,98.036 ; 137.878,97.58 ccw(c139.192,98.895) VR2.2@139.192,97.036 ; VR2.2@138.909,97.253 ccw(c138.226,96.57) 138.226,97.536 ccw(c138.226,98.502) VR2.2@138.909,97.819
NetDAC0832_9: DAC0832.9 R1.1 U.1 | length 77.2
  Top Layer w1: R1.1 126.492,167.767 127.635,166.624 U.1 ; R1.1@120.171,167.484 cw(c120.854,166.801) 120.854,167.767 cw(c120.854,168.733) R1.1@120.171,168.05 ; U.1@127.352,163.351 ccw(c126.669,164.034) 127.635,164.034 ccw(c128.601,164.034) U.1@127.918,163.351
  Bottom Layer w1: U.1@126.781,162.214 ccw(c125.928,163.068) U.1@127.135,163.068 ; U.1 125.73,161.163 125.73,150.613 111.584,136.467 111.584,135.059 112.58,134.063 127.684,134.063 DAC0832.9 ; DAC0832.9@133.104,128.143 ccw(c131.897,128.143) 132.75,128.997 ccw(c133.604,129.85) DAC0832.9@133.604,128.643
NetDAC0832_11: DAC0832.11 U.2 | length 33.6
  Top Layer w1: U.2 130.937,160.528 132.969,158.496 132.969,143.002 136.144,139.827 DAC0832.11 ; U.2@128.018,160.245 cw(c128.701,159.562) 128.701,160.528 cw(c128.701,161.494) U.2@128.018,160.811 ; DAC0832.11@135.79,136.117 ccw(c134.937,136.97) 136.144,136.97 ccw(c137.351,136.97) DAC0832.11@136.498,136.117
NetR1_2: 
NetR3_2: 
NetR6_2: R4.2 S6.1 | length 11.1
  Top Layer w1: R4.2 77.597,165.862 80.137,165.862 S6.1 ; R4.2@75.438,164.203 ccw(c75.438,165.41) 76.292,164.557 ; S6.1@81.823,164.176 cw(c80.97,163.322) S6.1@82.177,163.322
NetS5_1: S2.1 U1.22 | length 36.6
  Top Layer w1: U1.22@91.44,92.964 120.142,92.964 121.031,92.075 S2.1 ; U1.22@92.204,93.501 ccw(c93.5,94.797) 93.5,92.964 ; S2.1@124.331,91.792 ccw(c123.648,91.109) 123.648,92.075 ccw(c123.648,93.041) S2.1@124.331,92.358
NetS6_1: S3.1 U1.23 | length 38.1
  Top Layer w1: U1.23@91.44,95.504 95.504,95.504 99.949,99.949 S3.1 ; U1.23@92.204,96.041 ccw(c93.5,97.337) 93.5,95.504 ; S3.1@124.331,99.666 ccw(c123.648,98.983) 123.648,99.949 ccw(c123.648,100.915) S3.1@124.331,100.232
NetS7_1: S4.1 U1.24 | length 40
  Top Layer w1: U1.24@91.44,98.044 93.853,98.044 102.997,107.188 S4.1 ; U1.24@92.204,98.581 ccw(c93.5,99.877) 93.5,98.044 ; S4.1@124.331,106.905 ccw(c123.648,106.222) 123.648,107.188 ccw(c123.648,108.154) S4.1@124.331,107.471
NetS8_1: S5.1 U1.25 | length 41.9
  Top Layer w1: U1.25@91.44,100.584 105.791,114.935 S5.1 ; U1.25@92.321,100.838 cw(c93.835,100.838) 92.764,101.908 ; S5.1@124.331,114.652 ccw(c123.648,113.969) 123.648,114.935 ccw(c123.648,115.901) S5.1@124.331,115.218
RXD: ?.4 header.2 U1.10 | length 84.3
  Top Layer w1: ?.4 71.882,146.558 78.613,139.827 78.613,118.11 U1.10 80.645,116.078 85.217,111.506 header.2 ; ?.4@67.085,146.275 cw(c67.768,145.592) 67.768,146.558 cw(c67.768,147.524) ?.4@67.085,146.841 ; U1.10@76.964,115.795 cw(c77.647,115.112) 77.647,116.078 cw(c77.647,117.044) U1.10@76.964,116.361 ; U1.10@77.081,116.078 cw(c78.288,116.078) 77.435,116.932 ; header.2@84.934,82.706 ccw(c84.251,83.389) 85.217,83.389 ccw(c86.183,83.389) header.2@85.5,82.706
SA: 
SB: R3.1 U2.7 | length 13.7
  Top Layer w1: U2.7@106.143,162.843 ccw(c105.46,163.526) 106.426,163.526 ccw(c107.392,163.526) U2.7@106.709,162.843 ; U2.7 106.426,165.989 108.204,167.767 R3.1 ; R3.1@112.62,167.484 ccw(c111.937,166.801) 111.937,167.767 ccw(c111.937,168.733) R3.1@112.62,168.05
SC: R1.2 R2.2 R3.2 U2.6 | length 21.9
  Top Layer w1: U2.6 119.761,160.02 R1.2 ; U2.6@106.809,159.737 cw(c107.492,159.054) 107.492,160.02 cw(c107.492,160.986) U2.6@106.809,160.303 ; 111.872,160.02 ccw(c111.872,161.078) R3.2@112.62,160.33 ; 112.002,160.02 cw(c112.002,159.146) R3.2@112.62,159.764 ; R3.2@113.186,159.764 cw(c113.804,159.146) 113.804,160.02 ; R3.2@113.186,160.33 ccw(c113.934,161.078) 113.934,160.02 ; 114.868,160.02 ccw(c114.868,161.511) R2.2@115.922,160.457 ; R2.2@116.488,160.457 ccw(c117.542,161.511) 117.542,160.02 ; 118.857,160.02 ccw(c118.857,161.078) R1.2@119.605,160.33 ; 118.987,160.02 cw(c118.987,159.146) R1.2@119.605,159.764
TXD: ?.5 header.3 U1.11 | length 83.9
  Top Layer w1: 66.1,143.189 ccw(c65.371,143.918) ?.5@66.402,143.918 ; 66.165,143.254 cw(c66.802,142.617) ?.5@66.802,143.518 ; ?.5 66.802,143.891 64.77,141.859 64.77,114.935 66.421,113.284 U1.11@76.2,113.284 ; 74.902,113.284 ccw(c74.902,115.117) U1.11@76.198,113.821 ; U1.11 80.391,113.538 82.677,111.252 header.3 ; U1.11@76.964,113.255 cw(c77.647,112.572) 77.647,113.538 cw(c77.647,114.504) U1.11@76.964,113.821 ; header.3@82.394,82.706 ccw(c81.711,83.389) 82.677,83.389 ccw(c83.643,83.389) header.3@82.96,82.706
VCC: 1.10 1.14 ?.2 C1.1 DAC0832.19 DAC0832.20 header.1 R2.1 R4.1 RP.1 U1.40 VR1.3 VR2.1 | length 443.8
  Top Layer w1: 64.678,165.389 ccw(c63.825,166.243) VR1.3@65.032,166.243 ; VR1.3 64.008,164.719 64.008,152.654 65.024,151.638 ?.2 71.247,151.638 75.438,155.829 R4.1 C1.1 ; ?.2@66.519,151.355 ccw(c65.836,150.672) 65.836,151.638 ccw(c65.836,152.604) ?.2@66.519,151.921 ; ?.2@67.085,151.355 cw(c67.768,150.672) 67.768,151.638 cw(c67.768,152.604) ?.2@67.085,151.921 ; 74.646,155.037 ccw(c73.701,155.983) R4.1@75.038,155.983 ; R4.1@75.721,155.8 cw(c76.404,155.117) 76.404,156.083 cw(c76.404,157.049) R4.1@75.721,156.366 ; header.1@87.474,82.706 ccw(c86.791,83.389) 87.757,83.389 ccw(c88.723,83.389) header.1@88.04,82.706 ; header.1@88.257,82.423 ccw(c89.464,82.423) header.1@88.611,81.569 ; C1.1@89.252,155.8 ccw(c88.569,155.117) 88.569,156.083 ccw(c88.569,157.049) C1.1@89.252,156.366 ; C1.1@89.535,155.956 92.456,155.956 93.472,154.94 93.472,140.843 91.694,140.843 ; C1.1@89.818,155.7 cw(c90.436,155.082) 90.436,155.956 ; C1.1@89.818,156.266 ccw(c90.566,157.014) 90.566,155.956 ; U1.40@91.538,139.221 ccw(c90.855,139.904) 91.821,139.904 ccw(c92.787,139.904) U1.40@92.104,139.221 ; U1.40 91.821,140.716 91.694,140.843 ; 93.726,140.97 101.6,140.97 ; 101.6,140.289 ccw(c103.866,140.289) RP.1@102.264,138.686 ; 101.889,82.712 cw(c102.743,81.859) 1.10@102.743,83.066 ; RP.1 101.6,138.684 101.6,140.97 ; 1.10@102.743,84.066 ccw(c102.743,85.701) 103.899,84.545 ; 111.747,84.545 ccw(c112.903,85.701) 1.14@112.903,84.066 ; DAC0832.20@112.784,135.763 ccw(c111.577,135.763) 112.43,136.617 ccw(c113.284,137.47) DAC0832.20@113.284,136.263 ; 1.14@112.903,83.066 cw(c112.903,81.859) 113.757,82.712 ; DAC0832.20@113.638,135.409 cw(c114.491,134.556) 114.491,135.763 cw(c114.491,136.97) DAC0832.20@113.638,136.117 ; DAC0832.19@115.47,135.409 ccw(c114.617,134.556) 114.617,135.763 ccw(c114.617,136.97) DAC0832.19@115.47,136.117 ; DAC0832.19 DAC0832.20 108.077,140.97 101.6,140.97 ; R2.1@115.922,168.277 ccw(c115.239,168.96) 116.205,168.96 ccw(c117.171,168.96) R2.1@116.488,168.277 ; R2.1 116.205,170.688 116.148,170.745 66.918,170.745 66.41,171.253 62.622,171.253 62.565,171.196 57.15,171.196 54.483,168.529 54.483,81.915 59.563,76.835 87.63,76.835 89.408,78.613 89.408,80.772 ; VR2.1@138.909,94.613 cw(c138.226,93.93) 139.192,93.93 cw(c140.158,93.93) VR2.1@139.475,94.613 ; VR2.1 139.192,83.566 137.033,81.407 115.062,81.407 1.14 112.726,83.566 111.026,85.266 104.62,85.266 102.92,83.566 1.10 97.155,77.978 92.202,77.978 89.408,80.772 ; 89.408,80.772 header.1 87.757,138.684 89.916,140.843 91.694,140.843
  Bottom Layer w1: C1.1 C1.1@89.662,156.083
pads on no net: 1.1 1.2 1.3 1.4 1.5 1.6 1.11 1.12 1.13 ?.15 ?.16 U1.14 U1.15 U1.16 U1.17 U1.26 U1.27 U1.28 U1.29 U1.30 U1.31 U2.1 U2.2 U2.3 U2.8 U2.9 U2.10 U2.12 U2.13 U2.14 U.5 U.6 U.7 U.8 U.9 U.10 U.12 U.13 U.14

## Polygon pours and split planes (outlines as drawn)
no net on Internal Plane 1 (split plane): 153.779,70.614 52.199,70.614 52.199,172.194 153.779,172.194
no net on Internal Plane 2 (split plane): 153.779,70.614 52.199,70.614 52.199,172.194 153.779,172.194

## Keep-outs
Keep-Out Layer:
  lines w0.3: 52.324,71.755 52.324,171.755 ; 52.989,71.404 152.989,71.404 152.989,171.404 ; 53.116,177.246 153.116,177.246

## Other copper
Top Layer:
  text "38#赵伟伟" at 147.447,74.168 h5

## Silkscreen, mask and mechanical layers (free items; w line width, h text height)
Drill Drawing:
  text ".LEGEND" at 159.369,75.184 h1.52
  text "Drill Drawing." at 159.369,72.644 h1.52

## Dimensions
52.324,71.755 to 52.324,171.755 on Mechanical 1
52.989,71.404 to 152.989,71.404 on Mechanical 1